# Altium PCB 宁波2号线PIS_数字功率放大器_网络音频(BHC-A-2030-02)_PCB(06001537)_V1.0.PcbDoc (part 7 of 7)
Units mm, origin at the board's own origin, x right, y up, seen from the top; angles counter-clockwise.
Board outline 86 x 96 mm, 4 copper layers (Top Layer, GND, VDD, Bottom Layer); 204 components, 185 nets, 781 pads, 267 vias.
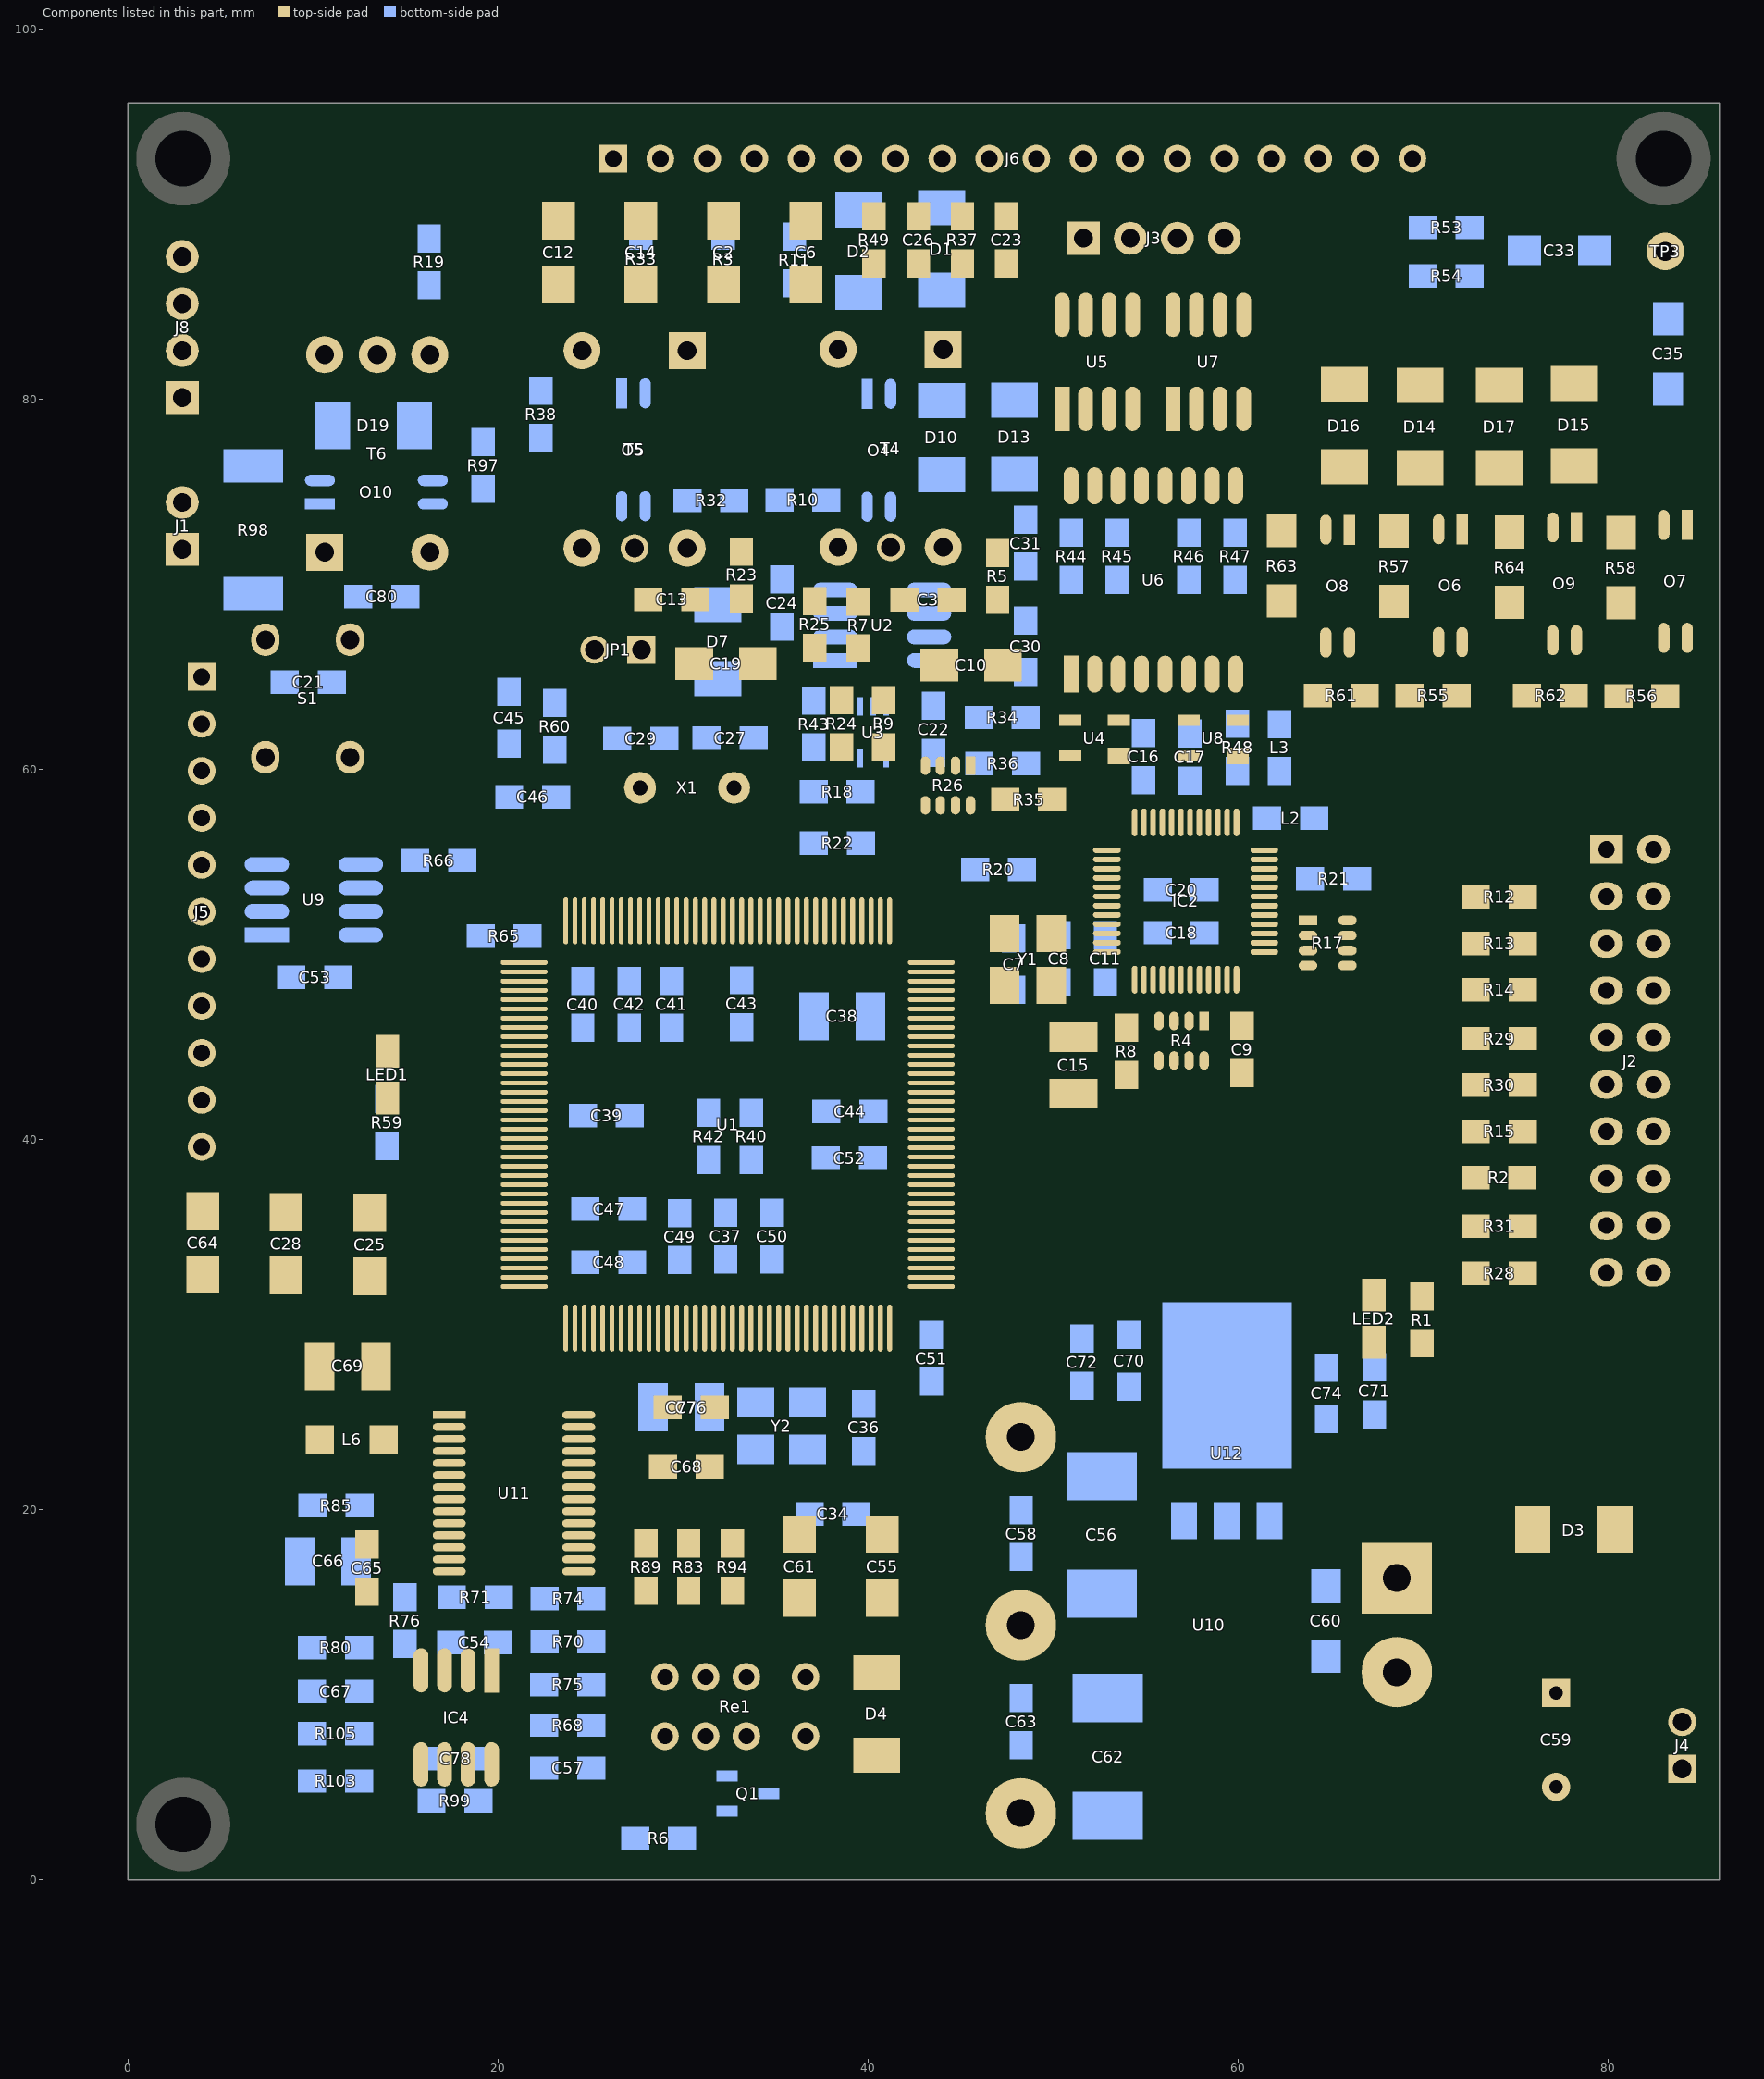
[diagram p9: the components of this part, seen from the top]

## Polygon pours and split planes (outlines as drawn) (continued)
DC+24V on VDD (split plane): 76.553,95.428 76.562,95.295 76.588,95.164 76.604,95.117 76.604,87.3 76.613,87.167 76.639,87.036 76.682,86.91 76.741,86.791 76.815,86.68 76.902,86.58 79.798,83.684 79.898,83.596 80.009,83.522 80.128,83.464 80.254,83.421 80.385,83.395 80.518,83.386 85.319,83.386 85.451,83.395 85.49,83.402 85.49,65.255 62.699,65.255 61.674,66.28 61.674,77.572 61.664,77.691 61.636,77.808 61.604,77.886 61.59,77.919 61.528,78.021 61.45,78.112 58.808,80.754 58.717,80.832 58.615,80.894 58.582,80.908 58.504,80.94 58.387,80.968 58.268,80.978 30.898,80.978 26.296,85.58 26.205,85.658 26.103,85.72 26.07,85.734 25.992,85.766 25.875,85.794 25.756,85.804 14.109,85.804 10.315,89.598 10.315,95.49 76.557,95.49
AC1+3.3V on VDD (split plane): 15.045,26.247 15.104,26.199 15.17,26.164 15.242,26.142 15.316,26.135 30.982,26.135 32.256,24.86 32.256,20.656 31.337,19.738 13.671,19.738 12.499,20.91 12.499,24.816 12.491,24.89 12.47,24.962 12.434,25.028 12.387,25.087 11.447,26.026 11.389,26.074 11.323,26.109 11.251,26.131 11.176,26.138 9.811,26.138 8.612,27.337 8.612,28.721 9.607,29.716 11.576,29.716
DC-5V on VDD (split plane): 11.733,13.761 11.733,6.071 11.74,5.996 11.762,5.924 11.797,5.858 11.845,5.8 13.979,3.666 14.037,3.619 14.103,3.583 14.175,3.562 14.249,3.554 37.033,3.554 37.108,3.562 37.18,3.583 37.246,3.619 37.304,3.666 38.458,4.821 38.49,4.838 38.549,4.885 40.418,6.755 43.891,6.755 43.966,6.762 44.038,6.784 44.104,6.819 44.162,6.867 45.269,7.974 58.185,7.974 58.748,7.411 58.748,1.631 57.627,0.51 46.052,0.51 46.052,2.54 46.045,2.615 46.023,2.687 45.988,2.753 45.94,2.811 45,3.751 44.942,3.798 44.876,3.834 44.804,3.855 44.729,3.863 40.208,3.863 40.134,3.855 40.062,3.834 39.996,3.798 39.937,3.751 38.576,2.389 8.566,2.389 7.901,3.054 7.901,5.436 7.894,5.51 7.872,5.582 7.837,5.648 7.789,5.706 5.859,7.637 5.801,7.684 5.735,7.72 5.663,7.741 5.588,7.749 4.121,7.749 2.692,9.177 2.692,13.073 4.527,14.908 10.586,14.908
DC110V on VDD (split plane): 9.218,71.342 9.218,68.713 8.249,67.744 3.986,67.744 3.911,67.736 3.839,67.715 3.773,67.679 3.715,67.632 2.039,65.955 1.991,65.897 1.956,65.831 1.934,65.759 1.927,65.684 1.927,13.307 1.923,13.295 1.916,13.221 1.923,13.146 1.927,13.134 1.927,8.966 1.934,8.892 1.956,8.82 1.991,8.754 2.039,8.695 2.097,8.648 2.163,8.612 2.179,8.608 3.692,7.095 3.75,7.048 3.816,7.012 3.888,6.991 3.962,6.983 5.429,6.983 7.136,5.277 7.136,3.353 7.136,2.896 7.143,2.821 7.165,2.749 7.2,2.683 7.248,2.625 8.137,1.736 8.195,1.688 8.261,1.653 8.333,1.631 8.407,1.624 38.735,1.624 38.81,1.631 38.882,1.653 38.948,1.688 39.006,1.736 40.367,3.097 44.571,3.097 45.286,2.381 45.286,0.51 6.552,0.51 6.519,0.55 5.742,1.327 5.742,2.616 5.735,2.691 5.73,2.706 5.74,2.784 5.748,3 5.74,3.216 5.714,3.43 5.672,3.642 5.614,3.849 5.539,4.052 5.449,4.248 5.343,4.436 5.223,4.615 5.09,4.785 4.943,4.943 4.785,5.09 4.615,5.223 4.436,5.343 4.248,5.449 4.052,5.539 3.849,5.614 3.642,5.672 3.43,5.714 3.284,5.732 3.271,5.739 3.199,5.76 3.124,5.768 1.657,5.768 0.626,6.799 0.568,6.846 0.51,6.877 0.51,72.16 8.401,72.16

## Other copper
GND (plane layer: these items are gaps in the copper):
  circle w1.524: c3,3 r2.015
  circle w1.524: c3,93 r2.015
  rectangle: 59.436,8.661 60.731,10.693
  rectangle: 60.35,7.366 61.443,12.09
  rectangle: 61.443,8.585 63.348,13.208
  rectangle: 57.683,0.432 63.805,9.449
  rectangle: 63.094,0.203 65.253,19.202
  rectangle: 64.414,0.152 66.98,20.574
  rectangle: 65.888,0.102 67.818,21.946
  rectangle: 67.158,0.305 85.573,22.53
  rectangle: 1.219,1.295 4.928,4.75
  rectangle: 0.152,0.203 2.362,2.235
  region: 0.203,95.848 0.203,93.638 2.235,93.638 2.235,95.848
  region: 1.295,94.781 1.295,91.072 4.75,91.072 4.75,94.781
  lines w0.762: -0.127,90.59 2.718,90.59 3.327,91.199 ; -0.051,89.447 2.819,92.317 2.819,93.435 5.258,95.873 4.623,95.873 3.708,94.959 5.41,94.959 6.426,95.975 5.944,95.975 4.47,94.501 4.47,94.679 5.766,95.975 6.883,95.975 5.41,94.501 5.41,92.774 ; 0.051,90.844 0.127,90.92 2.438,90.92 ; 0.66,90.844 0.66,92.901 0.787,93.028 ; 2.972,0.787 3.099,0.66 5.156,0.66 ; 3.226,5.41 1.499,5.41 0.025,6.883 0.025,5.766 1.321,4.47 1.499,4.47 0.025,5.944 0.025,6.426 1.041,5.41 1.041,3.708 0.127,4.623 0.127,5.258 2.565,2.819 3.683,2.819 6.553,-0.051 ; 4.801,3.327 5.41,2.718 5.41,-0.127 ; 5.08,2.438 5.08,0.127 5.156,0.051
  lines w1.524: 56.464,0.279 58.242,2.057 58.242,9.246 63.017,14.021 63.017,18.694 67.412,23.089 85.7,23.089
  lines w2.032: 77.572,95.225 77.572,87.351 80.467,84.455 81.813,84.455 85.242,84.455
VDD (plane layer: these items are gaps in the copper):
  circle w0.508: c3,3 r2.492
  circle w0.508: c3,3 r2.115
  circle w0.508: c3,93 r2.115
  circle w0.508: c3,93 r2.492
  rectangle: 79.35,85.217 86.233,95.682
  rectangle: 77.724,86.741 80.391,95.682
  rectangle: 65.811,0.178 85.496,22.352
  rectangle: 59.258,0 65.862,9.347
  rectangle: 59.868,8.865 66.523,10.262
  rectangle: 60.833,10.033 66.421,11.1
  rectangle: 61.671,10.871 66.446,11.887
  rectangle: 62.433,11.786 66.37,12.903
  rectangle: 63.322,12.802 66.573,13.843
  rectangle: 64.338,13.259 66.396,20.574
  rectangle: 64.668,20.015 66.954,21.336
  rectangle: 49.149,8.992 50.267,17.526
  rectangle: 46.787,8.89 50.19,16.764
  rectangle: 45.263,9.423 47.904,15.799
  rectangle: 1.057,1.057 4.943,4.943
  region: 1.057,94.943 1.057,91.057 4.943,91.057 4.943,94.943
  lines w0.762: 0.076,90.59 0.127,90.641 ; 0.152,6.02 1.6,4.572 1.651,4.572 ; 0.152,91.758 1.295,91.758 1.702,91.352 0.991,90.641 0.127,90.641 ; 0.152,94.527 0.152,94.705 1.118,95.67 ; 0.254,5.512 1.168,4.597 1.168,3.81 ; 0.254,90.818 0.635,90.818 ; 0.279,89.752 1.168,90.641 1.651,90.641 ; 0.305,1.702 1.626,0.381 2.718,0.381 ; 0.33,1.118 1.295,0.152 1.473,0.152 ; 0.356,6.528 1.499,5.385 3.124,5.385 ; 0.381,93.282 0.381,94.374 1.702,95.695 ; 0.508,72.542 5.182,72.542 6.325,72.542 8.56,72.542 9.601,71.501 9.601,68.555 8.407,67.361 3.986,67.361 2.31,65.684 2.31,8.966 ; 0.533,4.978 0.584,4.928 0.584,3.2 ; 1.448,91.631 1.118,91.631 0.127,90.641 ; 2.299,13.221 4.369,15.291 ; 2.336,8.993 3.962,7.366 5.588,7.366 7.518,5.436 ; 2.362,17.297 4.369,15.291 ; 2.438,14.681 3.075,15.318 3.075,15.502 ; 2.616,16.612 3.075,16.153 3.075,15.502 ; 2.616,90.641 0.127,90.641 ; 2.87,14.402 3.632,15.164 4.166,15.164 3.413,15.164 3.075,15.502 ; 3.075,16.043 3.827,15.291 4.369,15.291 ; 3.2,95.416 4.928,95.416 4.978,95.467 ; 3.81,94.832 4.597,94.832 5.512,95.746 ; 4.242,0.152 4.242,1.295 4.648,1.702 5.359,0.991 5.359,0.127 ; 4.369,1.448 4.369,1.118 5.359,0.127 ; 4.572,94.349 4.572,94.4 6.02,95.848 ; 5.182,0.254 5.182,0.635 ; 5.359,1.651 5.359,1.168 6.248,0.279 ; 5.359,2.616 5.359,0.127 ; 5.385,92.876 5.385,94.501 6.528,95.644 ; 5.41,0.076 5.359,0.127 ; 7.518,3.353 7.518,5.436 ; 11.481,30.099 9.449,30.099 ; 21.361,3.937 22.352,3.937 24.079,5.664 ; 23.114,4.14 24.028,5.055 24.028,5.359 ; 24.994,4.064 24.994,4.089 24.359,4.724 24.359,4.14 24.079,4.42 24.079,5.664 ; 26.264,3.937 25.806,3.937 24.079,5.664 ; 31.674,13.411 37.998,13.411 45.39,20.803 45.441,20.803 45.441,24.994 45.441,25.832 46.507,26.899 50.216,26.899 51.105,26.01 51.105,23.444 51.105,19.558 ; 34.366,13.411 26.06,13.411 24.079,11.43 24.079,5.664 ; 38.252,5.156 37.033,3.937 14.249,3.937 12.116,6.071 12.116,13.919 10.744,15.291 4.369,15.291 ; 38.278,5.156 40.259,7.137 43.891,7.137 45.11,8.357 ; 43.739,7.137 45.263,8.661 45.263,10.135 ; 45.212,8.357 45.11,8.357 ; 45.314,9.347 46.228,8.433 46.609,8.433 ; 45.72,0.178 45.669,0.229 45.669,2.54 44.729,3.48 40.208,3.48 38.735,2.007 8.407,2.007 7.518,2.896 7.518,5.436 ; 46.838,8.56 45.263,10.135 ; 49.657,8.484 51.105,9.931 ; 49.759,10.109 51.283,8.585 52.299,8.585 ; 50.343,10.16 52.045,8.458 52.146,8.458 ; 50.622,17.678 50.622,10.414 49.2,8.992 46.921,8.992 45.646,10.267 45.646,15.343 46.736,16.434 48.819,16.434 50.722,18.337 50.722,18.634 ; 52.705,8.407 51.181,9.931 51.105,9.931 ; 56.794,-0.127 57.531,-0.127 59.614,1.956 ; 58.014,8.357 58.344,8.357 59.258,7.442 ; 59.944,10.033 59.817,10.033 58.141,8.357 45.11,8.357 ; 64.237,60.884 55.372,60.884 ; 9.449,30.099 8.23,28.88 8.23,27.178 9.652,25.756 11.176,25.756 12.116,24.816 12.116,20.752 13.513,19.355 31.496,19.355 32.639,20.498 32.639,25.019 31.14,26.518 15.316,26.518 11.735,30.099 9.449,30.099 ; 45.263,10.135 45.263,15.799 46.482,17.018 48.565,17.018 51.105,19.558 ; 51.105,9.931 51.105,19.558 ; 55.372,60.884 65.1,60.884 65.38,60.604 65.38,59.207 64.16,57.988 64.16,53.162 63.373,52.375 54.712,52.375 53.492,53.594 53.492,59.004 55.372,60.884
  lines w1.016: 59.182,0.152 59.258,0.229 59.258,9.347 64.135,14.224 64.135,20.371 66.243,22.479 85.725,22.479
  lines w1.524: 9.55,95.733 9.55,89.281 13.792,85.039 25.756,85.039 30.582,80.213 31.521,80.213 58.268,80.213 60.909,77.572 60.909,65.964 62.382,64.491 62.941,64.491 65.837,64.491 ; 65.71,64.491 85.7,64.491
  lines w2.032: 77.572,95.428 77.622,95.377 77.622,87.3 80.518,84.404 85.319,84.404

## Silkscreen, mask and mechanical layers (free items; w line width, h text height)
Top Overlay:
  drawing of 1409 lines, arcs and shapes, not listed
  text "23.24 (mm)" at 7.468,96.85 h1.52
  text "BHC-A-2030-02 V1.0" at 6.299,91.846 h2.29
  text "网络音频板" at 9.119,89.179 h2
  text "噪声1 噪声2" at 5.893,88.29 h1.52 r270
  text "2014-01-06" at 9.169,87.452 h1.02
  text "应急" at 5.867,73.736 h1.52 r270
  text "96 (mm)" at -1.086,43.15 h1.52 r90
  text "86 (mm)" at 38.15,-7.914 h1.52
Mechanical 2:
  the board outline again, w0.508
  text "机械层2  定义外形尺寸" at 34,-4 h3.81